# EAGLE board fibre_optic (EAGLE 7.7.0)

Size 19 x 27 mm. Coordinates in mm from the lower left corner, seen from the top.
Outline: 0,0 19,0 19,27 0,27 0,0
Copper layers (1*16): Top 0.035mm / dielectric 1.5mm / Bottom 0.035mm
Design rules "default": minimum track width 10mil, minimum drill 24mil, track to track 8mil, track to pad 8mil, pad to pad 8mil, via to via 8mil, smd to smd 8mil, copper to edge 40mil, drill to drill 8mil, minimum pad ring 10mil, minimum via ring 8mil, stop-mask expansion 4mil, vias tented up to drill 0mil, thermal gap 10mil

## Footprints (pad centres in the part's own frame; a part is rotated, then mirrored left to right if it is on the bottom)
LZ-GQ-003 = drill 1.1 square: DATA -2.54,0; GND 2.54,0; VCC 0,0 | hole 3: 3.75,-3.6; -3.75,-3.6

## Placement (x,y rotation side)
E$1  [LZ-GQ-003]  10,13 90 top

## Library data of the parts
E$1 = DA